# EAGLE board sonda1 (EAGLE 4.16)
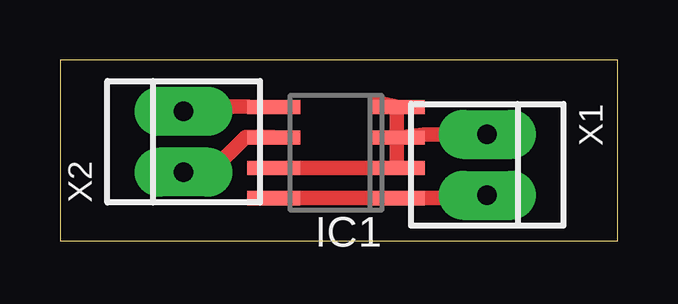
[diagram p0: board, top side]

Size 23.25 x 7.54 mm. Coordinates in mm from the lower left corner, seen from the top.
Outline: 0,0 23.25,0 23.25,7.54 0,7.54 0,0
Copper layers (1*16): Top 0.035mm / dielectric 1.5mm / Bottom 0.035mm
Design rules "mio2": minimum track width 24mil, minimum drill 24mil, track to track 24mil, track to pad 24mil, pad to pad 24mil, via to via 24mil, smd to smd 24mil, copper to edge 40mil, drill to drill 8mil, minimum pad ring 24mil, minimum via ring 24mil, stop-mask expansion 4mil, vias tented up to drill 0mil, thermal gap 10mil

## Footprints (pad centres in the part's own frame; a part is rotated, then mirrored left to right if it is on the bottom)
SO-08 = smd 0.6 x 2.2: 1 -1.905,-2.6; 2 -0.635,-2.6; 3 0.635,-2.6; 4 1.905,-2.6; 5 1.905,2.6; 6 0.635,2.6; 7 -0.635,2.6; 8 -1.905,2.6
22-23-2021 = drill 0.813 long: 1 -1.27,0; 2 1.27,0

## Placement (x,y rotation side)
IC1  24LC16BSN  [SO-08]  11.5,3.67 90 top
U$1  [A4P-LOC]  -74.55,-125.72 0 top  (outside the outline)
X1  22-23-2021  [22-23-2021]  17.8,3.16 270 top
X2  22-23-2021  [22-23-2021]  5.15,4.13 90 top

## Library data of the parts
IC1 = microchip
U$1 = frames
X1 X2 = con-molex

## Nets
GND: IC1.2 IC1.3 IC1.4 IC1.7 X1.1
N$1: IC1.6 X2.1
N$2: IC1.5 X2.2
VCC: IC1.1 IC1.8 X1.2

## Tracks (layer width: path | path; a pad name or v marks a point on that pad's centre or on a via)
GND
  Top 0.61: IC1.3 14.04,4.53 14.04,5.35 IC1.4 13.23,5.75 | IC1.3 14.04,4.13 14.04,3.31 IC1.2 IC1.7 | X1.1 15.16,4.43 IC1.3
N$1
  Top 0.61: X2.1 6.27,2.86 7.74,4.33 8.88,4.33 IC1.6
N$2
  Top 0.61: IC1.5 7.84,5.6 7.13,5.6 X2.2
VCC
  Top 0.61: IC1.8 9.98,1.79 13.03,1.79 IC1.1 15.16,1.79 15.82,1.79 X1.2

## Text on the board
Pads: www.pyacqua.net